# Altium PCB ctrl_board.PcbDoc
Units mil, origin at the board's own origin, x right, y up, seen from the top; angles counter-clockwise.
Board outline 3779.53 x 2559.06 mil, 2 copper layers (Top Layer, Bottom Layer); 103 components, 73 nets, 349 pads, 75 vias.
Unrouted connection lines stored in the file: 74.
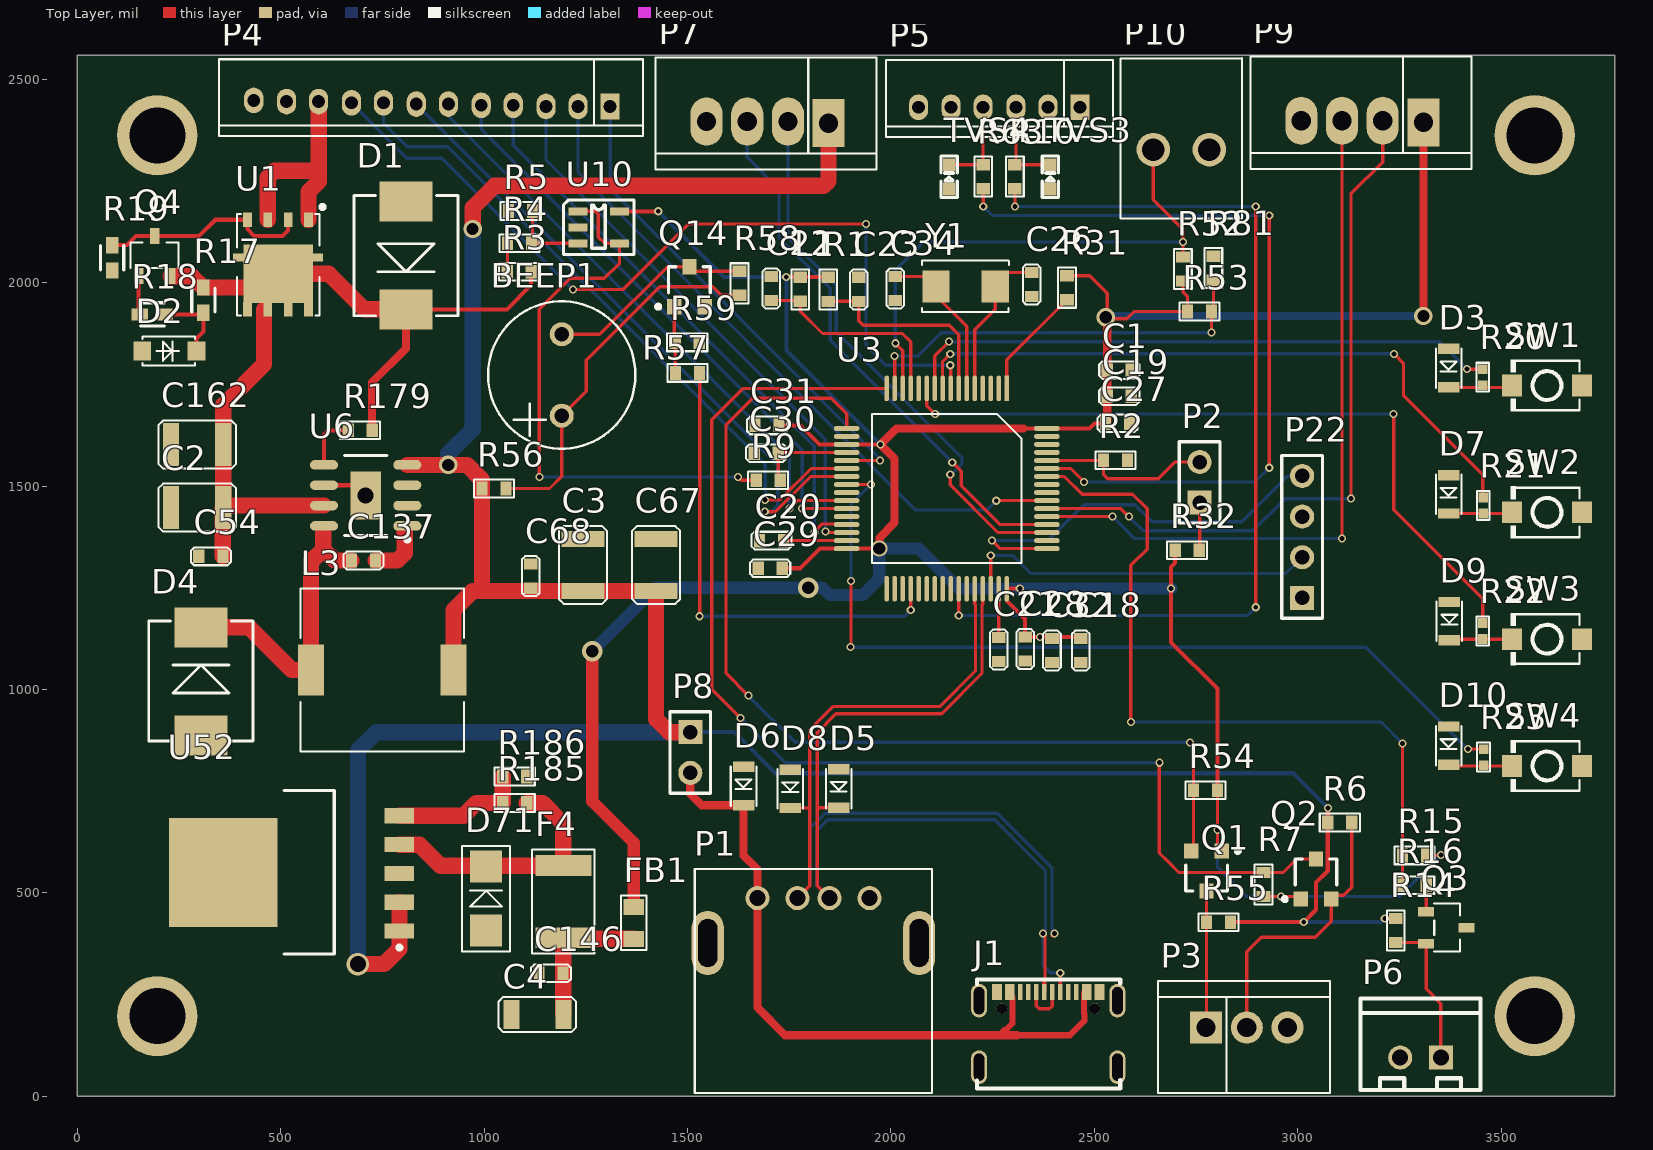
[diagram p0: Top Layer view]
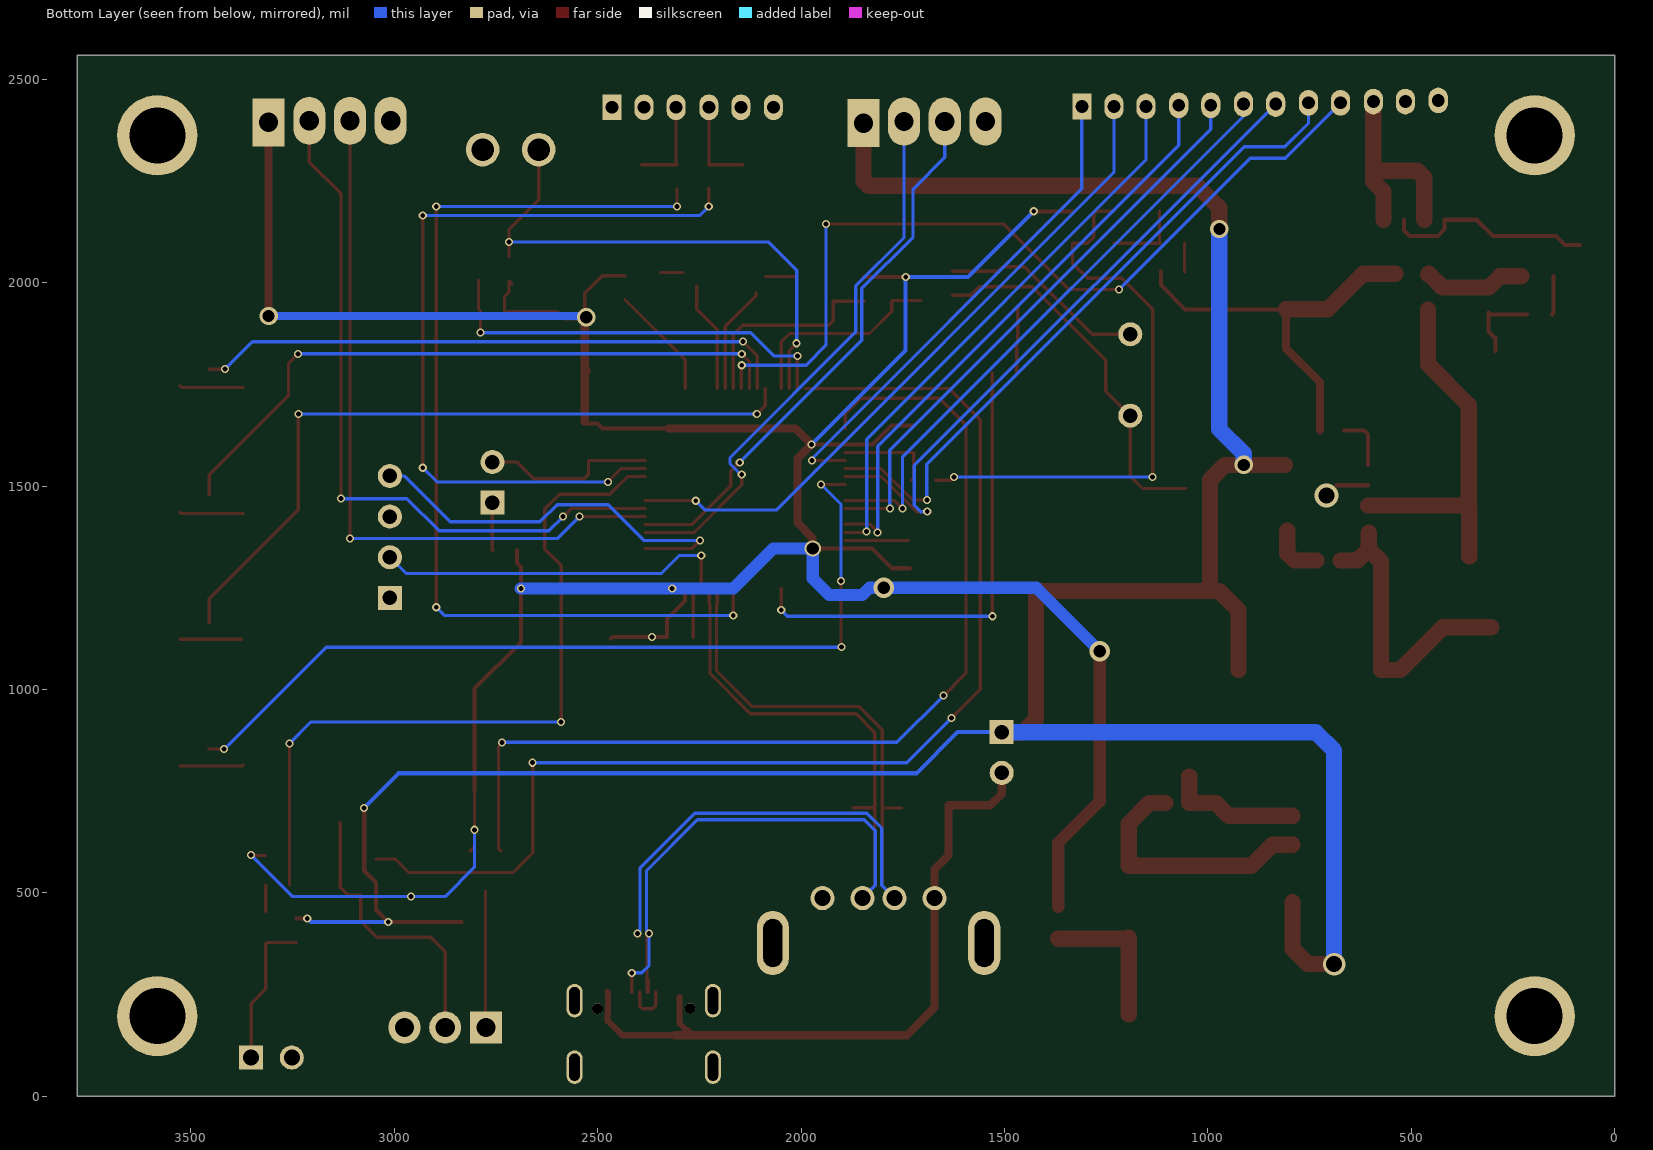
[diagram p1: Bottom Layer view, seen from below]

## Layer stack, top to bottom
Top Layer: signal copper 1.4
Dielectric: dielectric 12.6, FR-4, Dk 4.8
Bottom Layer: signal copper 1.4

## Board outline
0,0 3779.53,0 3779.53,2559.06 0,2559.06

## Design rules (kind name [scope] priority, off if disabled: settings)
Clearance [All] p1: gap=5
DiffPairsRouting [All] p1: maxlimit=50 minlimit=8 mostfreqgap=8 maxuncoupledlength=500
PolygonConnect [All] p1: connectstyle=Relief reliefconductorwidth=10 reliefentries=4 polygonreliefangle="90 Angle"
RoutingVias [All] p1: holewidth=28 width=50 viastyle="Through Hole" minholewidth=12 minwidth=20 maxholewidth=28 maxwidth=50
SilkscreenOverComponentPads [IsPad] p1: minsilkscreentomaskgap=10
SolderMaskExpansion [All] p1: expansion=4
Width [All] p1: maxlimit=200 minlimit=5 preferedwidth=10
26 further rules are at their usual default settings.

## Classes and differential pairs
component class connector: D5 D6 D8 J1 P1 P3 P4 P5 P6 P7 P9 Q1 Q2 Q3 R6 R7 R10 R14 R15 R16 R54 R55 R63 TVS3 TVS4
component class cpu: C1 C18 C19 C20 C21 C22 C23 C26 C27 C28 C29 C30 C31 C32 C34 D3 D7 D9 D10 FB1 L1 P2 P22 R1 R2 R3 R4 R5 R9 R20 R21 R22 R23 R31 R32 SW1 SW2 SW3 SW4 U3 U10 Y1
component class drv: BEEP1 Q14 R56 R57 R58 R59
component class power: C2 C3 C4 C54 C67 C68 C137 C146 C162 D1 D2 D4 D71 F4 L3 P8 Q4 Q6 R17 R18 R19 R179 R185 R186 U1 U6 U52
component class pt100: P10 R52 R53 R81
differential pair USB: +USB_P -USB_N

## Components (designator, comment, footprint, x,y, rotation, side; value= is the part's Value field where it differs from the comment)
BEEP1 "BEEP-9.5X5.5" BEEP-9.5X5.5 1191,1773 r90 top
C1 "0.1uF/50V/X5R" 0603C 2591,1785 r180 top
C2 "47uF/25V" 1210C 359,1447 r180 top
C3 "22uF/10V" 1210C 1243,1242 r90 top
C4 "47uF/25V" 1206C 1067,201 r0 top
C18 "1uF/50V/X5R" 0603C 2467,1066 r90 top
C19 "0.1uF/50V/X5R" 0603C 2591,1721 r180 top
C20 "0.1uF/50V/X5R" 0603C 1677,1366 r0 top
C21 "0.1uF/50V/X5R" 0603C 2265,1069 r90 top
C22 "0.1uF/50V/X5R" 0603C 1706,2015 r270 top
C23 "0.1uF/50V/X5R" 0603C 1921,2013 r270 top
C26 "12P 50V" 0603C 2346,1966 r90 top
C27 "1uF/50V/X5R" 0603C 2587,1654 r180 top
C28 "0.1uF/50V/X5R" 0603C 2330,1070 r90 top
C29 "1uF/50V/X5R" 0603C 1674,1298 r0 top
C30 "0.1uF/50V/X5R" 0603C 1664,1581 r0 top
C31 "1uF/50V/X5R" 0603C 1666,1649 r0 top
C32 "0.1uF/50V/X5R" 0603C 2396,1066 r90 top
C34 "12P 50V" 0603C 2011,1956 r90 top
C54 "1uF" 0603C 299,1327 r0 top
C67 "22uF/10V" 1210C 1423,1242 r90 top
C68 "0.1uF/50V" 0603C 1115,1249 r90 top
C137 "0.01uF" 0603C 674,1317 r0 top
C146 "0.1uF/50V" 0603C 1135,302 r0 top
C162 "47uF/25V" 1210C 359,1602 r180 top
D1 "SMCJ18CA" SMC 808,2200 r270 top
D2 "BZT52C18" sod123 160,1832 r0 top
D3 "CESDB5V0D3" SOD323 3371,1837 r270 top
D4 "SS54" SMC 304,887 r90 top
D5 "CESDB5V0D3" SOD323 1872,804 r270 top
D6 "CESDB5V0D3" SOD323 1638,810 r270 top
D7 "CESDB5V0D3" SOD323 3371,1527 r270 top
D8 "CESDB5V0D3" SOD323 1753,803 r270 top
D9 "CESDB5V0D3" SOD323 3373,1215 r270 top
D10 "CESDB5V0D3" SOD323 3371,909 r270 top
D71 "5.1V" SMA 1005,407 r90 top
F4 "2A" 1812-F 1195,567 r270 top
FB1 "JWWBW2012 M600HT" 0805CZ 1368,387 r90 top
J1 "TYPE C_16P" TYPEC_16P 2387,87 r0 top
L1 "MPZ1608D101BTA00" 0603R 1777,1954 r90 top
L3 "CDRH105NP-100NC" CDRH105 549,847 r90 top
P1 "Header 6" USB-A 1672,487 r0 top
P2 "Header 2" HDR1X2 2759,1459 r90 top
P3 "Header 3" 3X2.54MMZ 2775,169 r0 top
P4 "Header 11" 12X2MMZ 1310,2433 r180 top
P5 "Header 6" 6X2MMZ 2465,2431 r180 top
P6 "SIP-2" SIP-2A 3302,95 r180 top
P7 "Header 4" 4X2.54MMZ 1847,2392 r180 top
P8 "Header 2" HDR1X2 1507,895 r270 top
P9 "Header 4" 4X2.54MMZ 3309,2394 r180 top
P10 "Header 2" KF250NH-3.5-2P 2783,2327 r180 top
P22 "Header 4" HDR1X4 3011,1225 r90 top
Q1 "AO3400" SOT-23 2776,554 r180 top
Q2 "AO3400" SOT-23 3045,534 r0 top
Q3 "MMBT9015" SOT23-3 3316,454 r180 top
Q4 "MMBT4403-7-F" SOT23-3 151,2016 r270 top
Q14 "LH8050QLT1G" SOT-23 1505,1990 r0 top
R1 "10K" 0603R 1846,2013 r270 top
R2 "10K" 0603R 2523,1563 r0 top
R3 "100K" 0603R 1116,2027 r180 top
R4 "100K" 0603R 1058,2097 r0 top
R5 "20K" 0603R 1119,2176 r180 top
R6 "10K" 0603r 3133,673 r180 top
R7 "10K" 0603r 2916,491 r90 top
R9 "49.9" 0603R 1669,1514 r0 top
R10 "100R" 0603R 2305,2290 r270 top
R14 "10K" 0603R 3241,378 r90 top
R15 "1K" 0603R 3317,592 r180 top
R16 "1K" 0603R 3316,519 r180 top
R17 "Resistor_0603" RESC1608X055N_0603 310,1957 r90 top
R18 "Resistor_0603" RESC1608X055N_0603 185,1922 r180 top
R19 "Resistor_0603" RESC1608X055N_0603 86,2061 r270 top
R20 "RESISTOR_0" 0402R 3455,1748 r90 top
R21 "RESISTOR_0" 0402R 3456,1432.51 r90 top
R22 "RESISTOR_0" 0402R 3455,1124 r90 top
R23 "RESISTOR_0" 0402R 3457,814 r90 top
R31 "100K" 0603R 2433,2017 r270 top
R32 "10K" 0603R 2758,1342 r180 top
R52 "2K" 0603R 2718,2063 r270 top
R53 "2K" 0603R 2788,1929 r180 top
R54 "10K" 0603r 2744,752 r0 top
R55 "10K" 0603r 2776,428 r0 top
R56 "51R" 0603R 1054,1494 r180 top
R57 "4.7K" 0603R 1530,1778 r180 top
R58 "1K" 0603R 1628,2028 r270 top
R59 "47K" 0603R 1470,1853 r0 top
R63 "100R" 0603R 2227,2290 r270 top
R81 "75" 0603R 2793,2065 r270 top
R179 "100K" 0603R 666,1637 r0 top
R185 "120K/1%" 0603R 1105,721 r180 top
R186 "71.5K/1%" 0603R 1105,786 r180 top
SW1 "SW PUSHBUTTON" SW-SMD_L3.9-W3.0-P4.45 3613,1747 r180 top
SW2 "SW PUSHBUTTON" SW-SMD_L3.9-W3.0-P4.45 3613,1435.33 r180 top
SW3 "SW PUSHBUTTON" SW-SMD_L3.9-W3.0-P4.45 3613,1123.67 r180 top
SW4 "SW PUSHBUTTON" SW-SMD_L3.9-W3.0-P4.45 3613,812 r180 top
TVS3 "ESD5Z5.0CT1G" SOD-523 2392,2260 r90 top
TVS4 "ESD5Z5.0CT1G" SOD-523 2143,2260 r90 top
U1 "Si7997DP" "PowerPAK SO-8" 595,2192 r270 top
U3 "STM32F405RGT6" LQFP-64 2285,1740 r270 top
U6 "LM22676MRE-5.0/NOPB" SOP127P600X168_HS-8N 709,1477 r180 top
U10 "AD8615AUJZ-R2" sot-23-5 1282,2136 r0 top
U52 "MIC29302" TO228P1435X457-6N 792,406 r180 top
Y1 "8MHz" CRAY_5032 2111,1991 r0 top

## Footprints (in the part's own frame and the unit in brackets; to place one, negate y for a bottom-side part, rotate by r counter-clockwise, add the part's x,y. Pads: shape width x height; smd on the part's side, far side on the other; paste and mask are expansions set on the pad)
3X2.54MMZ [mm]
  rect 2x2 hole 1.2: 1(0,0)
  round 2 hole 1.2: 2(2.54,0) 3(5.08,0)
  silkscreen extent -3,-4.1 7.75,2.9
4X2.54MMZ [mm]
  rect 2x3 hole 1.2: 1(0,0)
  oval 2x3 hole 1.2: 2(2.54,-0.1) 3(5.08,-0.1) 4(7.62,-0.1)
  silkscreen extent -3,-4.1 10.79,2.9
6X2MMZ [mm]
  rect 1.2x1.6 hole 0.8: 1(0,0)
  oval 1.2x1.6 hole 0.8: 2(2,0) 3(4,0) 4(6.05,0) 5(8.05,0) 6(10.08,0)
  silkscreen extent -2.05,-2.95 12.12,1.85
12X2MMZ [mm]
  rect 1.2x1.6 hole 0.8: 1(0,0)
  oval 1.2x1.6 hole 0.8: 2(2,0) 3(4,0) 4(6.05,-0.076) 5(8.05,-0.076) 6(10.1,-0.152) 7(12.1,-0.152) 8(14.15,-0.229) 9(16.15,-0.229) 10(18.2,-0.305) 11(20.2,-0.305) 12(22.25,-0.381)
  silkscreen extent -2.05,-2.95 24.43,1.85
0402R [mm]
  rect 0.6x0.6 smd: 1(0,0) 2(1,0)
  silkscreen extent -0.4,-0.4 1.4,0.4
0603C [mm]
  rect 0.7x0.85 smd: 1(0,0) 2(1.5,0)
  silkscreen extent -0.5,-0.55 2,0.55
0603R [mm]
  rect 0.7x0.85 smd: 1(0,0) 2(1.5,0)
  silkscreen extent -0.5,-0.55 2,0.55
0603r [mm]
  rect 0.7x0.85 smd: 1(0,0) 2(1.5,0)
  silkscreen extent -0.5,-0.55 2,0.55
0805CZ [mm]
  rect 1x1.3 smd: 1(0,0) 2(2,0)
  silkscreen extent -0.7,-0.8 2.7,0.8
1206C [mm]
  rect 1x1.8 smd: 1(0,0) 2(3.25,0)
  silkscreen extent -0.8,-1.1 4.05,1.1
1210C [mm]
  rect 1x2.7 smd: 1(0,0) 2(3.25,0)
  silkscreen extent -0.8,-1.5 4.05,1.5
1812-F [mm]
  rect 1.3x3.5 smd: 1(0,0) 2(4.5,0)
  silkscreen extent -1,-1.95 5.5,1.95
BEEP-9.5X5.5 [mm]
  round 1.5 hole 0.9: 1(-2.54,0) 2(2.54,0)
  silkscreen extent -4.6,-4.6 4.6,4.6
CDRH105 [mm]
  rect 3.2x1.6 smd: 1(5.1,-0.65) 2(5.1,-9.55)
  silkscreen extent 0,-10.2 10.2,0
CRAY_5032 [mm]
  rect 1.7x2 smd: 1(0,0) 2(3.7,0)
  silkscreen extent -0.86,-1.6 4.55,1.6
HDR1X2 [mm] "Connector; Header; 2 Position"
  rect 1.5x1.5 hole 0.9: 1(0,0)
  round 1.5 hole 0.9: 2(2.54,0)
  silkscreen extent -1.27,-1.27 3.81,1.27
HDR1X4 [mm] "Connector; Header; 4 Position"
  rect 1.5x1.5 hole 0.9: 1(0,0)
  round 1.5 hole 0.9: 2(2.54,0) 3(5.08,0) 4(7.62,0)
  silkscreen extent -1.27,-1.27 8.89,1.27
KF250NH-3.5-2P [mm]
  round 2.1 hole 1.41: 1(0,0) 2(3.5,0)
  silkscreen extent -2.05,-5.71 5.55,4.3
LQFP-64 [mm]
  rect 1.6x0.3 smd: 1(0,0)
  oval 1.6x0.3 smd: 2(0,-0.5) 3(0,-1) 4(0,-1.5) 5(0,-2) 6(0,-2.5) 7(0,-3) 8(0,-3.5) 9(0,-4) 10(0,-4.5) 11(0,-5) 12(0,-5.5) 13(0,-6) 14(0,-6.5) 15(0,-7) 16(0,-7.5) 33(12.5,-7.5) 34(12.5,-7) 35(12.5,-6.5) 36(12.5,-6) 37(12.5,-5.5) 38(12.5,-5) 39(12.5,-4.5) 40(12.5,-4) 41(12.5,-3.5) 42(12.5,-3) 43(12.5,-2.5) 44(12.5,-2) 45(12.5,-1.5) 46(12.5,-1) 47(12.5,-0.5) 48(12.5,0)
  oval 0.3x1.6 smd: 17(2.5,-10) 18(3,-10) 19(3.5,-10) 20(4,-10) 21(4.5,-10) 22(5,-10) 23(5.5,-10) 24(6,-10) 25(6.5,-10) 26(7,-10) 27(7.5,-10) 28(8,-10) 29(8.5,-10) 30(9,-10) 31(9.5,-10) 32(10,-10) 49(10,2.5) 50(9.5,2.5) 51(9,2.5) 52(8.5,2.5) 53(8,2.5) 54(7.5,2.5) 55(7,2.5) 56(6.5,2.5) 57(6,2.5) 58(5.5,2.5) 59(5,2.5) 60(4.5,2.5) 61(4,2.5) 62(3.5,2.5) 63(3,2.5) 64(2.5,2.5)
  silkscreen extent 1.59,-8.41 10.91,0.91
"PowerPAK SO-8" [mm]
  rect 0.9x0.54 smd: 1(0.95,-0.67) 2(0.95,-1.94) 3(0.95,-3.21) 4(0.95,-4.48) 5(6.548,-4.48) 6(6.548,-3.21) 7(6.548,-1.94) 8(6.548,-0.67)
  rect 0.5x1.6 smd: 5(3.3,-4.575) 8(3.3,-0.575)
  rect 3.66x2.5 smd: 5(4.325,-3.495)
  rect 3.66x2 smd: 8(4.325,-1.401)
  silkscreen extent 0.03,-5.12 6.93,0.33
RESC1608X055N_0603 [mil] "Chip Resistor, 0603"
  round 10 on Mech3: 0(0,0)
  rect 40x30 smd: 1(-30.98,0) 2(30.98,0)
  silkscreen extent -30,-29 30,29, body extent -31,-16 31,16, height 22
SIP-2A [mm]
  rect 1.5x1.5 hole 1: 1(-1.27,0)
  round 1.5 hole 1: 2(1.27,0)
  silkscreen extent -3.75,-3.68 3.75,2.02, body extent -3.7,-3.81 3.7,2.29, height 7.5
SMA [mm]
  rect 2x2 smd: 1(0,0) 2(4,0)
  silkscreen extent -1.3,-1.5 5.3,1.5
SMC [mm]
  rect 2.5x3.3 smd: 1(0,0) 2(6.75,0)
  silkscreen extent -0.35,-3.25 7.15,3.25
sod123 [mm]
  rect 1.1x1.2 smd: 1(0,0) 2(3.385,0)
  silkscreen extent 0,-0.9 3.3,0.9
SOD323 [mm]
  rect 0.65x1.35 smd: 1(0,0) 2(2.4,0)
  silkscreen extent -0.03,-0.8 2.44,0.8
SOD-523 [mil]
  rect 31.5x30 smd: 1(-30,0) 2(30,0)
  silkscreen extent -51,-20 51,20, body extent -31,-16 31,16, height 26
SOP127P600X168_HS-8N [mm] "SOP, 8-Leads, Body 5.0x4.0mm (max), Pitch 1.27mm, IPC Medium Density"
  oval 1.75x0.6 smd: 1(-2.6,1.905) 2(-2.6,0.635) 3(-2.6,-0.635) 4(-2.6,-1.905) 5(2.6,-1.905) 6(2.6,-0.635) 7(2.6,0.635) 8(2.6,1.905)
  rect 1.9x3 smd: 9(0,0)
  silkscreen extent -2.73,-2.5 1.33,2.88, body extent -2,-2.5 2,2.5, height 1.68
SOT23-3 [mm]
  rect 1x0.6 smd: 1(0,0) 2(0,2) 3(-2.5,1)
  silkscreen extent -2.1,-0.5 -0.5,2.5
SOT-23 [mm] "SOT-23; 3 Leads; Body 3.0 x 2.6 mm, inc. leads (LxW max)"
  rect 0.9x0.95 smd: 1(-0.95,-1.25) 2(0.95,-1.25) 3(0,1.25)
  silkscreen extent -2.08,-1.37 1.3,1.25
sot-23-5 [mm]
  rect 1.2x0.5 smd: 1(-1.3,1) 2(-1.3,0) 3(-1.3,-1) 4(1.3,-1) 5(1.3,1)
  silkscreen extent -2.2,-1.7 2.2,1.7
SW-SMD_L3.9-W3.0-P4.45 [mm]
  rect 1.23x1.36 smd: 1(-2.185,0) 2(2.185,0)
  silkscreen extent -2.03,-1.62 2.25,1.62
TO228P1435X457-6N [mm] "D2-PAK, 6-Pads, Body 8.6x10.2mm (max), IPC Medium Density"
  rect 1.85x0.95 smd: 1(0,0) 2(0,-1.8) 3(0,-3.6) 4(0,-5.4) 5(0,-7.2)
  rect 6.8x6.8 smd: 6(11,-3.671)
  silkscreen extent -0.13,-8.77 7.2,1.43, body extent 4.2,-8.77 12.84,1.43, height 4.57
TYPEC_16P [mm]
  oval 1x2.1 hole 0.65 slot 1.7 at 90 deg: 1(-4.32,-0.391) 1(-4.32,3.759) 1(4.32,-0.391) 1(4.32,3.759)
  round 0.67 hole 0.67: 2(-2.89,3.259) 2(2.89,3.259)
  rect 0.3x1 smd: A1(-3.05,4.293) A4(-2.25,4.293) A5(-1.25,4.293) A6(-0.25,4.293) A7(0.25,4.293) A8(1.25,4.293) A9(2.25,4.293) A12(3.35,4.293) B1(3.05,4.293) B4(2.55,4.293) B5(1.75,4.293) B6(0.75,4.293) B7(-0.75,4.293) B8(-1.75,4.293) B9(-2.55,4.293) B12(-3.35,4.293)
  silkscreen extent -4.44,-1.73 4.49,5.07
USB-A [mm]
  round 1.5 hole 1: 1(0,0) 2(2.5,0) 3(4.5,0) 4(7,0)
  oval 2x4 hole 1.2 slot 3 at 90 deg: 5(-3.1,-2.8) 6(10.1,-2.8)
  silkscreen extent -3.91,-12.17 10.89,1.83

## Part data
C1 C18 C19 C20 C21 C22 C23 C26 C27 C28 C29 C30 C31 C32 C34: library part CAP4, "贴片电容 20%"
C2 C3 C54 C67 C68 C137 C162: library part CAP, "Capacitor"
C4 C146: library part Cap, "Capacitor"
D1 D3 D4 D5 D6 D7 D8 D9 D10 D71: library part "DIODE S", "Schottky Diode"
D2: library part BZT52C12S-7-F
F4: library part "Fuse 1", "Fuse"
FB1: library part FB
L1: library part CIZHU1, "磁珠电感 100R 100MHz"
L3: library part INDUCTOR
P1 P5: "Header, 6-Pin"
P2 P8: "Header, 2-Pin"
P3: "Header, 3-Pin"
P4: "Header, 11-Pin"
P6: "XH2.54 2P 立贴"
P7 P9 P22: "Header, 4-Pin"
Q1 Q2 Q14: library part NPN-1, "NPN"
Q3: library part PNP
Q4: library part OEM_Diodes_MMBT4403
R1 R2 R10 R31 R32 R63: library part RES2, "贴片电阻 5%"
R3 R4 R5 R9 R14 R15 R16 R179: library part Res1, "Resistor"
R6 R7 R54 R55: library part R, "贴片电阻 1%"
R52 R53 R81: library part R
R56 R57 R58 R59: library part RES0, "贴片电阻 5%"
R185 R186: library part R, "R"
TVS3 TVS4: library part TVS-1, "TVS"
U1: "Sia430DJ"
U3: library part STM32F405RG, "MCU"
U6: library part LM22676MR-5.0
U10: library part AD8615
Y1: library part XTAL, "晶振"

## Free pads (board coordinates)
  round 196.85 hole 137.8: 1(196.85,196.85) 1(196.85,2362.2) 1(3582.68,196.85) 1(3582.68,2362.2)

## Via types
v1: diameter 20, hole 12, Top Layer to Bottom Layer, tented both sides, 64 vias
v2: diameter 45, hole 30, Top Layer to Bottom Layer, tented both sides, 4 vias
v3: diameter 20, hole 12, Top Layer to Bottom Layer, 2 vias
v4: diameter 50, hole 30, Top Layer to Bottom Layer, tented both sides, 2 vias
v5: diameter 55, hole 40, Top Layer to Bottom Layer, tented both sides, 1 vias
v6: diameter 59.06, hole 39.37, Top Layer to Bottom Layer, 1 vias
v7: diameter 40, hole 30, Top Layer to Bottom Layer, tented both sides, 1 vias

## Nets (pads, with @x,y where several pads share a name; then routed paths per layer and width w, separated by ;. In a path a pad name is that pad's centre, name@x,y a point inside that pad or via, vN(x,y) a via of type N, cw(c..) or ccw(c..) an arc to the next point about the centre after c; other vN are vias at no path point)
3.3V_MCU: P22.1
air_FREQ: R15.2 R16.2 U3.58 | length 1857
  Top Layer w8: U3.58 2426.54,1523.46 2470,1480 2594,1480 2630,1444 2630,1345 2590,1305 v1(2590,920) ; R16.2@3257.94,520 R15.2 v1(3257.94,867.06)
  Bottom Layer w8: v1(2590,920) 3205,920 v1(3257.94,867.06)
air_pwr: P4.9 U3.8 | length 2104.4
  Top Layer w8: v1(1219,1983) 1341,1983 1502,2144 v1(1939,2144) ; v1(2146,1797) 2147.2,1795.8 U3.8
  Bottom Layer w8: P4.9 810.17,2306 896,2306 v1(1219,1983) ; v1(1939,2144) 1939,1846 1988,1797 v1(2146,1797)
air_RXD: Q2.3 R7.2 U3.16 | length 2991.3
  Top Layer w8: 1560,1620 1560,1584 ; v1(1630,930) 1560,1000 1560,1584 ; U3.16 1637,1740 1560,1663 1560,1584 ; v1(2660,820) 2660,598 2684,574 ; 2673,585 2684,574 ; Q2.3 2998.21,583.21 2965.06,550.06 R7.2 2707.94,550.06 2684,574
  Bottom Layer w8: v1(1630,930) 1740,820 v1(2660,820)
air_TXD: Q1.2 R54.1 U3.17 | length 2469.4
  Top Layer w8: v1(1650,985) 1595,1040 1595,1651 1660,1716 1853,1716 1891.3,1677.7 U3.17 ; v1(2735,870) 2744,861 R54.1 2744,608.61 Q1.2
  Bottom Layer w8: v1(1650,985) 1765,870 v1(2735,870)
BAT_CHARGE: P4.10 U1.1 U1.3 | length 540.5
  Top Layer w40: U1.3 468.62,2258.62 485,2275 583.46,2275 593.46,2285 ; U1.1 568.62,2223.62 593.46,2248.46 593.46,2285 ; P4.10 593.46,2285
BATTERY: R9.1 U10.1 U10.4 | length 1409.6
  Top Layer w8: v1(1136,1522) 1136,1935 1212,2011 1296,2011 1333.18,2048.18 U10.4 1296.37,2096.63 1281,2112 1281,2168 1273.63,2175.37 U10.1 ; v1(1624,1522) 1632,1514 R9.1
  Bottom Layer w8: v1(1136,1522) v1(1624,1522)
ble_rxd: P7.3 U3.52 | length 1362.9
  Top Layer w8: v1(2151,1558) 2173,1536 2173,1501 2268.65,1405.35 U3.52
  Bottom Layer w8: P7.3 1647,2308 1725,2230 1725,2112 1851.1,1985.9 1851.1,1857.9 v1(2151,1558)
ble_txd: P7.2 U3.51 | length 1370.3
  Top Layer w8: v1(2146,1528) 2146,1503 2263.33,1385.67 U3.51
  Bottom Layer w8: P7.2 1747,2111 1866,1992 1866,1879 2174.94,1570.06 2174.94,1555.07 2147.87,1528 v1(2146,1528) v1@2146,1529
BOOT0: P2.2 R2.1 U3.60 | length 431.5
  Top Layer w8: U3.60 R2.1@2522.83,1562.83 ; R2.1 2523,1528 2533,1518 2657,1518 2698,1559 P2.2
cool1: P4.1 U3.21 | length 1226.7
  Top Layer w8: U3.21 v1(1973.17,1562.83)
  Bottom Layer w8: P4.1 1310,2231 1966,1575 1973.17,1567.83 v1(1973.17,1562.83)
COOL2: P4.2 U3.55 | length 1667.8
  Top Layer w8: v1(2259,1464) 2259.41,1464.41 U3.55
  Bottom Layer w8: P4.2 1231.26,2270.74 2061,1441 2236,1441 v1(2259,1464)
cool3: P4.4 U3.29 | length 1446.4
  Top Layer w8: v1(1812,1386) 1812,1387.87 1831.13,1407 1889.65,1407 U3.29
  Bottom Layer w8: P4.4 1071.81,2338 1812,1597.81 v1(1812,1386)
cool4: P4.3 U3.30 | length 1382.6
  Top Layer w8: v1(1839,1388) 1841.33,1385.67 U3.30
  Bottom Layer w8: P4.3 1152.52,2301.48 1839,1615 v1(1839,1388)
dec: R23.2 U3.24 | length 2138.3
  Top Layer w8: U3.24 v1(1950.78,1503.78) ; v1@1902,1105 v1(1902,1267) ; v1(3418.37,853.37) R23.2
  Bottom Layer w8: v1(1901,1104) 3167.74,1104 v1(3418.37,853.37) ; v1(1902,1267) 1902,1455 v1(1950.78,1503.78)
GND: C1.1 C2.2 C3.2 C4.1 C18.1 C19.1 C20.1 C21.1 C22.1 C23.1 C26.1 C27.1 C28.1 C29.1 C30.1 C31.1 C32.1 C34.1 C54.1 C67.2 C68.2 C146.1 C162.2 D1.1 D2.1 D3.1 D4.1 D5.1 D6.1 D7.1 D8.1 D9.1 D10.1 D71.1 J1.1 J1.A1 J1.A12 J1.B1 J1.B12 P1.4 P1.5 P1.6 P3.3 P4.11 P5.2 P6.2 P7.4 P9.4 P10.1 P22.3 Q3.3 Q14.2 R2.2 R5.2 R19.2 R59.2 R81.1 R186.1 SW1.1 SW2.1 SW3.1 SW4.1 TVS3.1 TVS4.1 U3.12 U3.18 U3.63 U6.6 U6.9 U10.2 U52.3 U52.6 | length 77.4
  Top Layer w10: U6.6 U6.9@684,1502
  other v6: 709,1477
heater_1: P4.8 U3.22 | length 1655.4
  Top Layer w8: v1(1691,1466) 1726.75,1466 1803.89,1543.15 U3.22
  Bottom Layer w8: P4.8 752.91,2392.09 811,2334 911,2334 1691,1554 v1(1691,1466)
heater_2: P4.7 U3.23 | length 1679.7
  Top Layer w8: v1(1690,1437) 1716.13,1437 1802.59,1523.46 U3.23
  Bottom Layer w8: P4.7 1722,1550.62 1722,1524 ; v1(1690,1437) 1706,1437 1722,1453 1722,1524 ; 1722,1474 1722,1524
heater_3: P4.6 U3.26 | length 1489.7
  Top Layer w8: v1(1751,1445) 1770.41,1464.41 U3.26
  Bottom Layer w8: P4.6 912.36,2409.64 1751,1571 v1(1751,1445)
HEATER_4: P4.5 U3.27 | length 1426.8
  Top Layer w8: v1@1782.28,1444.72 U3.27
  Bottom Layer w8: P4.5 993.07,2376.93 1782,1588 v1(1782,1445)
inc: R22.2 U3.11 | length 1803
  Top Layer w8: U3.11 2088.15,1697.85 v1(2109,1677) ; v1(3236,1677) 3236,1442 3455,1223 R22.2
  Bottom Layer w8: v1(2109,1677) v1(3236,1677)
NetBEEP1_1: BEEP1.1 R56.1 R58.2 | length 920
  Top Layer w8: R56.1 1161,1494 1191,1524 BEEP1.1 1251,1733 1251,1809 1432,1990 1562,1990 1583.06,1968.94 R58.2
NetBEEP1_2: BEEP1.2 Q14.3 R58.1 | length 510.5
  Top Layer w8: BEEP1.2 1285,1873 1451.21,2039.21 Q14.3 1516.21,2028 R58.1
NetC20_2: C20.2 U3.31 | length 155.3
  Top Layer w8: C20.2 U3.31
NetC21_2: C21.2 U3.47 | length 119.9
  Top Layer w8: C21.2 2265.31,1128.37 U3.47
NetC22_2: C22.2 L1.1 U3.13 | length 513.2
  Top Layer w8: C22.2 1775.06,1955.94 L1.1 1777,1930 1832,1875 2028,1875 2048.78,1854.22 U3.13
NetC23_2: C23.2 R1.2 U3.7 | length 515
  Top Layer w8: R1.2 C23.2 1921,1906 1932,1895 2144,1895 2166.89,1872.11 U3.7
NetC30_2: C30.2 R9.2 U3.20 | length 237.9
  Top Layer w8: R9.2 1723.06,1519 C30.2 1724.57,1582.52 U3.20
NetC137_1: C137.1 D4.2 L3.1 U6.8 | length 744.5
  Top Layer w40: D4.2 422.25,1152.75 527.21,1047.79 L3.1 574.59,1314.59 605,1345 ; 605,1385 605,1345 ; C137.1 633,1317 605,1345
NetC137_2: C137.2 U6.1 | length 134.4
  Top Layer w40: C137.2 787,1317 805,1335 805,1390
NetD2_2: D2.2 R17.1 R18.1 | length 196.6
  Top Layer w10: R18.1 305.98,1922 R17.1 310,1880 293.27,1863.27 D2.2
NetD3_2: D3.2 R20.1 SW1.2 | length 157.8
  Top Layer w8: D3.2 3522.49,1742.51 SW1.2
NetD7_2: D7.2 R21.1 SW2.2 | length 157.1
  Top Layer w8: D7.2 3524.16,1432.51 SW2.2
NetD9_2: D9.2 R22.1 SW3.2 | length 150.8
  Top Layer w8: D9.2@3376.15,1123.67 SW3.2
NetD10_2: D10.2 R23.1 SW4.2 | length 157
  Top Layer w8: D10.2 3373.51,812 SW4.2
NetD71_2: D71.2 F4.1 R185.1 U52.4 | length 638.5
  Top Layer w40: U52.4 841.4,618.6 893,567 F4.1 1195,670 1144,721 R185.1
NetP2_1: P2.1 R32.1 | length 117.4
  Top Layer w8: R32.1 2759,1343 P2.1
NetP3_1: P3.1 Q1.3 R55.1 | length 336.2
  Top Layer w8: P3.1 2776,170 Q1.3
NetP3_2: P3.2 Q2.2 R6.1 | length 705.1
  Top Layer w8: P3.2 2875,355 2911,391 3043,391 3082.4,430.4 Q2.2 Q2.2@3082.4,494 ; Q2.2@3083.4,494 3113,494 3133,514 R6.1
NetP5_3: P5.3 R10.1 TVS3.2 | length 229
  Top Layer w8: P5.3 2307.52,2292.52 R10.1 TVS3.2
NetP5_4: P5.4 R63.1 TVS4.2 | length 225.1
  Top Layer w8: TVS4.2 R63.1 2226.81,2290.19 P5.4
NetP6_1: P6.1 Q3.2 R14.1 | length 367.4
  Top Layer w8: R14.1 Q3.2@3313.26,378 ; Q3.2 3316,264 3352,228 P6.1
NetQ3_1: Q3.1 R16.1 | length 65
  Top Layer w8: Q3.1 R16.1
NetQ4_1: Q4.1 R18.2 | length 95.2
  Top Layer w10: Q4.1 151,1925.02 R18.2
NetQ4_3: Q4.3 R19.1 U1.2 U1.4 | length 520.2
  Top Layer w10: R19.1 121.98,2091.98 144.43,2114.43 Q4.3 299.43,2114.43 339.6,2154.6 U1.4 418.62,2131.38 435,2115 505,2115 518.62,2128.62 U1.2
NetQ14_1: Q14.1 R57.2 R59.1 | length 164.2
  Top Layer w8: Q14.1 1467.6,1855.4 R59.1 1470,1778.94 R57.2
NetR3_2: R3.2 R4.1 | length 70.4
  Top Layer w8: R3.2 1058,2028.06 R4.1
NetR4_2: R4.2 R5.1 U10.3 | length 193.7
  Top Layer w8: R5.1 1119,2098.94 R4.2 1230.45,2097 U10.3
NetR10_2: R10.2 U3.42 | length 2427.4
  Top Layer w8: v1(2166.89,1181.89) U3.42 ; v1(2305,2187) R10.2 ; v1@2897,1200 v1(2897,2187)
  Bottom Layer w8: v1(2166.89,1181.89) 2876.89,1181.89 v1(2897,1202) ; v1(2305,2187) v1(2897,2187)
NetR31_2: R31.2 U3.1 | length 279.2
  Top Layer w8: U3.1 2285,1809.94 R31.2
NetR63_2: R63.2 U3.59 | length 1955.9
  Top Layer w8: v1(2227,2187) R63.2 ; U3.59 2441.85,1543.15 v1(2475,1510) ; v1(2930,1545) v1(2930,2165)
  Bottom Layer w8: v1(2227,2187) 2249,2165 v1(2930,2165) ; v1(2475,1510) 2505,1510 ; 2500,1510 2505,1510 ; v1(2930,1545) 2895,1510 2505,1510
NetR179_1: R179.1 U6.5 | length 138.3
  Top Layer w10: U6.5 606.64,1626.64 617,1637 R179.1
NetR185_2: R185.2 R186.2 U52.5 | length 332
  Top Layer w40: U52.5 949.46,689.46 981,721 R185.2 R186.2
ok: R21.2 U3.9 | length 1621
  Top Layer w8: U3.9 2127,1740.52 2127,1806 v1(2146,1825) ; v1(3237,1825) 3260,1802 3260,1723 3455,1528 R21.2@3455,1478.37
  Bottom Layer w8: v1(2146,1825) v1(3237,1825)
OSC_IN: C26.2 U3.5 Y1.2 | length 327.2
  Top Layer w8: U3.5 2206.26,1884.26 2256.67,1934.67 Y1.2 ; 2290.72,2025.06 C26.2
OSC_OUT: C34.2 U3.6 Y1.1 | length 343.2
  Top Layer w8: C34.2 Y1.1@2086.94,2015.06 ; Y1.1@2111,1976 2111,1968 2186.57,1892.43 U3.6
PT2_1: P10.2 R52.1 U3.14 | length 1327.6
  Top Layer w8: v1(2011,1851) 2029.09,1832.91 U3.14 ; P10.2 2645.2,2203.8 2718,2131 v1(2718,2100) R52.1
  Bottom Layer w8: v1(2011,1851) 2011,2030 2081,2100 2168,2100 2245,2100 v1(2718,2100)
PT2_2: R53.1 R81.2 U3.15 | length 1012.9
  Top Layer w8: U3.15 v1(2009.41,1819.41) ; v1(2788,1877) R53.1 2793,1934 R81.2
  Bottom Layer w8: v1(2009.41,1819.41) 2066.41,1819.41 2124,1877 v1(2788,1877)
PT_VREF: C1.2 C18.2 C19.2 C27.2 C28.2 C29.2 C31.2 C32.2 FB1.2 L1.2 P9.1 Q1.1 Q2.1 R1.1 R7.1 R15.1 R31.1 R32.2 R52.2 R53.2 R54.2 U3.19 U3.32 U3.48 U3.64 U10.5 | length 8776.6
  Top Layer w8: R31.1 2489,2017 2531.94,1974.06 2531.94,1911.06 2580.06,1911.06 2598,1929 R53.2 2728.94,1967.06 2718,1978 R52.2 R52.2@2711.06,1997 ; R54.2 v1(2803.06,655) 2803.06,613.56 Q1.1 ; R7.1 v1(2959,491) Q2.1@3001.39,491 ; R15.1 v1@3351,592
  Top Layer w10: U10.5 v1(1428.37,2175.37) ; C31.2 1778,1649 1824.8,1602.2 U3.19 v1(1974.2,1602.2) ; C29.2 1778,1298 1826.3,1346.3 U3.32 v7(1971.7,1346.3) ; v1(1743,2014) 1845,2014 R1.1 ; 2261.43,1641.57 2326,1641.57 U3.64 2488.57,1641.57 2501,1654 C27.2 C27.2@2531.94,1658 ; v1(2317,1248) 2316.87,1247.87 U3.48 2285,1218 2330,1173 C28.2 2463,1129.06 C18.2 ; C1.2@2527.94,1781 C1.2 ; R32.2 2698.94,1310.94 2689,1301 v1(2689,1248) 2689,1116 2803.06,1001.94 R54.2
  Top Layer w20: v7(1971.7,1346.3) 1971.7,1372.7 2009,1410 2009,1567.41 v1(1974.2,1602.2) 2013.57,1641.57 2326,1641.57 ; C1.2@2527.94,1781 C1.2@2527.94,1785 ; v2(2528,1915) 2531.94,1911.06 C1.2 C19.2 C27.2@2531.94,1658 ; v2(3309,1918) P9.1
  Top Layer w30: v4(1266,1094) 1266,725 1368,623 FB1.2
  Bottom Layer w8: v1(2803.06,655) 2803.06,562.94 2875,491 v1(2959,491) 3250,491 v1(3352,593)
  Bottom Layer w10: v1(1428.37,2175.37) 1589.74,2014 v1(1743,2014) 1743,1833.41 v1(1974.2,1602.2)
  Bottom Layer w20: v2@2528,1918 v2(3309,1918)
  Bottom Layer w30: v4(1266,1094) 1422,1250 v4(1797,1250) 1832,1250 1850,1232 1931,1232 1971.7,1272.7 v7(1971.7,1346.3) 2068.7,1346.3 2167,1248 v1(2317,1248) v1(2689,1248)
  other v1: 2367,1129.06
rf_rxd: P9.2 U3.54 | length 1764.2
  Top Layer w8: U3.54 2565.28,1444.72 v1(2585,1425) ; v1(3131,1469) 3131,2218 3209,2296 P9.2
  Bottom Layer w8: v1(2585,1425) 2620,1390 2890,1390 2969,1469 v1(3131,1469)
rf_txd: P9.3 U3.53 | length 1774.8
  Top Layer w8: U3.53 v1(2545,1425) ; v1(3109,1371) P9.3
  Bottom Layer w8: v1(2545,1425) 2599,1371 v1(3109,1371)
set: R20.2 U3.10 | length 1469.6
  Top Layer w8: U3.10 2107.83,1819.83 v1(2143,1855) ; v1(3416.37,1787.37) R20.2
  Bottom Layer w8: v1(2143,1855) 3348.74,1855 v1(3416.37,1787.37)
SPEAK: R57.1 U3.36 | length 1176.2
  Top Layer w8: v1(1530,1180) R57.1 ; U3.36 2048.78,1195.22 v1(2049,1195)
  Bottom Layer w8: v1(1530,1180) 2034,1180 v1(2049,1195)
SWCLK: P22.4 U3.49 | length 1005.2
  Top Layer w8: v1(2249,1366) 2268.7,1346.3 U3.49
  Bottom Layer w8: v1(2249,1366) 2386,1366 2474,1454 2600,1454 2642,1412 2863,1412 2976,1525 P22.4
SWDIO: P22.2 U3.46 | length 881.8
  Top Layer w8: U3.46 v1(2245.63,1329.37)
  Bottom Layer w8: v1(2245.63,1329.37) 2299,1329.37 2343.37,1285 2971,1285 P22.2
USB_ID: U3.43
USB_N: D8.2 J1.A7 J1.B7 P1.2 U3.44 | length 2279
  Top Layer w8: D8.2 1799.31,708.51 ; P1.2 1800.8,517.37 1800.8,901.25 1857.54,958 2120,958 2208.1,1046.1 2208.1,1208.16 2206.26,1210 U3.44 ; J1.B7 2357.47,222.53 2365,215 2390,215 2396.84,221.84 J1.A7 ; v3@2396,394 v3(2402,400)
  Bottom Layer w8: P1.2 1801.8,518.37 1801.8,659.42 1838.37,696 2261.63,696 2396,561.63 2396,406 v3(2402,400)
USB_P: D5.2 J1.A6 J1.B6 P1.3 U3.45 | length 2431.5
  Top Layer w8: 1819.28,709.51 D5.2 ; P1.3 1818.8,517.37 1818.8,893.8 1865,940 2124.63,940 2224.1,1039.47 2224.1,1208.16 2225.94,1210 U3.45 ; v3(2374,400) 2379,395 2379,286.84 ; J1.B6 v1(2416.53,303.47)
  Top Layer w10: J1.A6 2377.16,285 2379,286.84
  Bottom Layer w8: P1.3 1817.8,518.37 1817.8,652.8 1845,680 2255,680 2380,555 2380,406 v3(2374,400) 2374,321 2391.53,303.47 v1(2416.53,303.47)
VCC_3.3V: C4.2 C146.2 F4.2 FB1.1 | length 363
  Top Layer w40: C4.2 C4.2 F4.2 1197.83,387 FB1.1
VCC_5V: C3.1 C67.1 C68.1 L3.2 P7.1 P8.1 R6.2 R14.2 R55.2 R56.2 U6.4 U52.1 U52.2 | length 7205.6
  Top Layer w10: R55.2 v1(3015,428) 3045.5,458.5 3045.5,525.3 3073.94,553.74 R6.2 3073.94,707.94 v1(3075,709) ; v1(3213.94,437.06) R14.2
  Top Layer w40: v5(690,325) 755,325 792,362 U52.1 U52.2 ; U6.4 958,1552 995,1515 995,1247 990,1242 ; L3.2 924.98,1194.98 972,1242 990,1242 ; v2(972,2132) 972,2184 1026,2238 1835,2238 1847,2250 P7.1 ; P8.1 1455,895 1423,927 C67.1 C3.1 990,1242
  Bottom Layer w10: P8.1 1616,895 1717,794 2990,794 v1(3075,709) ; v1(3015,428) 3204.89,428 v1(3213.94,437.06)
  Bottom Layer w40: v5(690,325) 690,850 735,895 P8.1 ; v2(912,1552) 912,1580 972,1640 v2(972,2132)
VDD5V: P5.1
VIN_BAT: C2.1 C54.2 C162.1 D1.2 Q4.2 R3.1 R17.2 R179.2 U1.5@457.41,2021.72 U1.6 U1.7 U1.8@539.83,2021.72 U6.7 | length 2149.4
  Top Layer w10: D1.2 1056.25,1934.25 1116,1994 R3.1
  Top Layer w20: R179.2 725.06,1755.06 808,1838 D1.2
  Top Layer w40: Q4.2 281.98,2016 R17.2 423.67,1987.98 457.41,2021.72 U1.5@459.25,2019.88 ; C54.2 358.06,1446.06 C2.1 C162.1 359,1699 459.25,1799.25 U1.6@459.25,1934.22 ; C2.1@364,1452 U6.7 ; U1.8@539.83,2021.72 618.28,2021.72 705.75,1934.25 D1.2
VUSB: D6.2 J1.A4 J1.A9 J1.B4 J1.B9 P1.1 P8.2 | length 1729
  Top Layer w15: 2280,160 2298.91,178.91 J1.A4@2298.91,243.7 ; 2310,150 2440,150 2475.58,185.58 2475.58,203.69 2475.09,204.18 2475.09,255.51 J1.A9
  Top Layer w20: P8.2 1507,743 1534.49,715.51 D6.2 1638,592 1672,558 P1.1 1672,218 1740,150 2270,150 ; 2280,160 2270,150 ; 2310,150 2270,150
pads on no net: J1.2 J1.A5 J1.A8 J1.B5 J1.B8 P4.12 P5.5 P5.6 R17.0 R18.0 R19.0 U1.5@414.88,2062.08 U1.5@418.62,1934.22 U1.8@568.62,1934.22 U1.8@572.36,2062.08 U3.2 U3.3 U3.4 U3.25 U3.28 U3.33 U3.34 U3.35 U3.37 U3.38 U3.39 U3.40 U3.41 U3.50 U3.56 U3.57 U3.61 U3.62 U6.2 U6.3

## Silkscreen, mask and mechanical layers (free items; w line width, h text height)
Mechanical 1:
  lines w10: 0,2559.06 3779.53,2559.06 3779.53,0 0,0 0,2560